# Altium PCB 8810.PcbDoc (part 1 of 2)
Units mm, origin at the board's own origin, x right, y up, seen from the top; angles counter-clockwise.
Board outline 295 x 220 mm, 2 copper layers (Top Layer, Bottom Layer); 156 components, 134 nets, 555 pads, 13 vias.
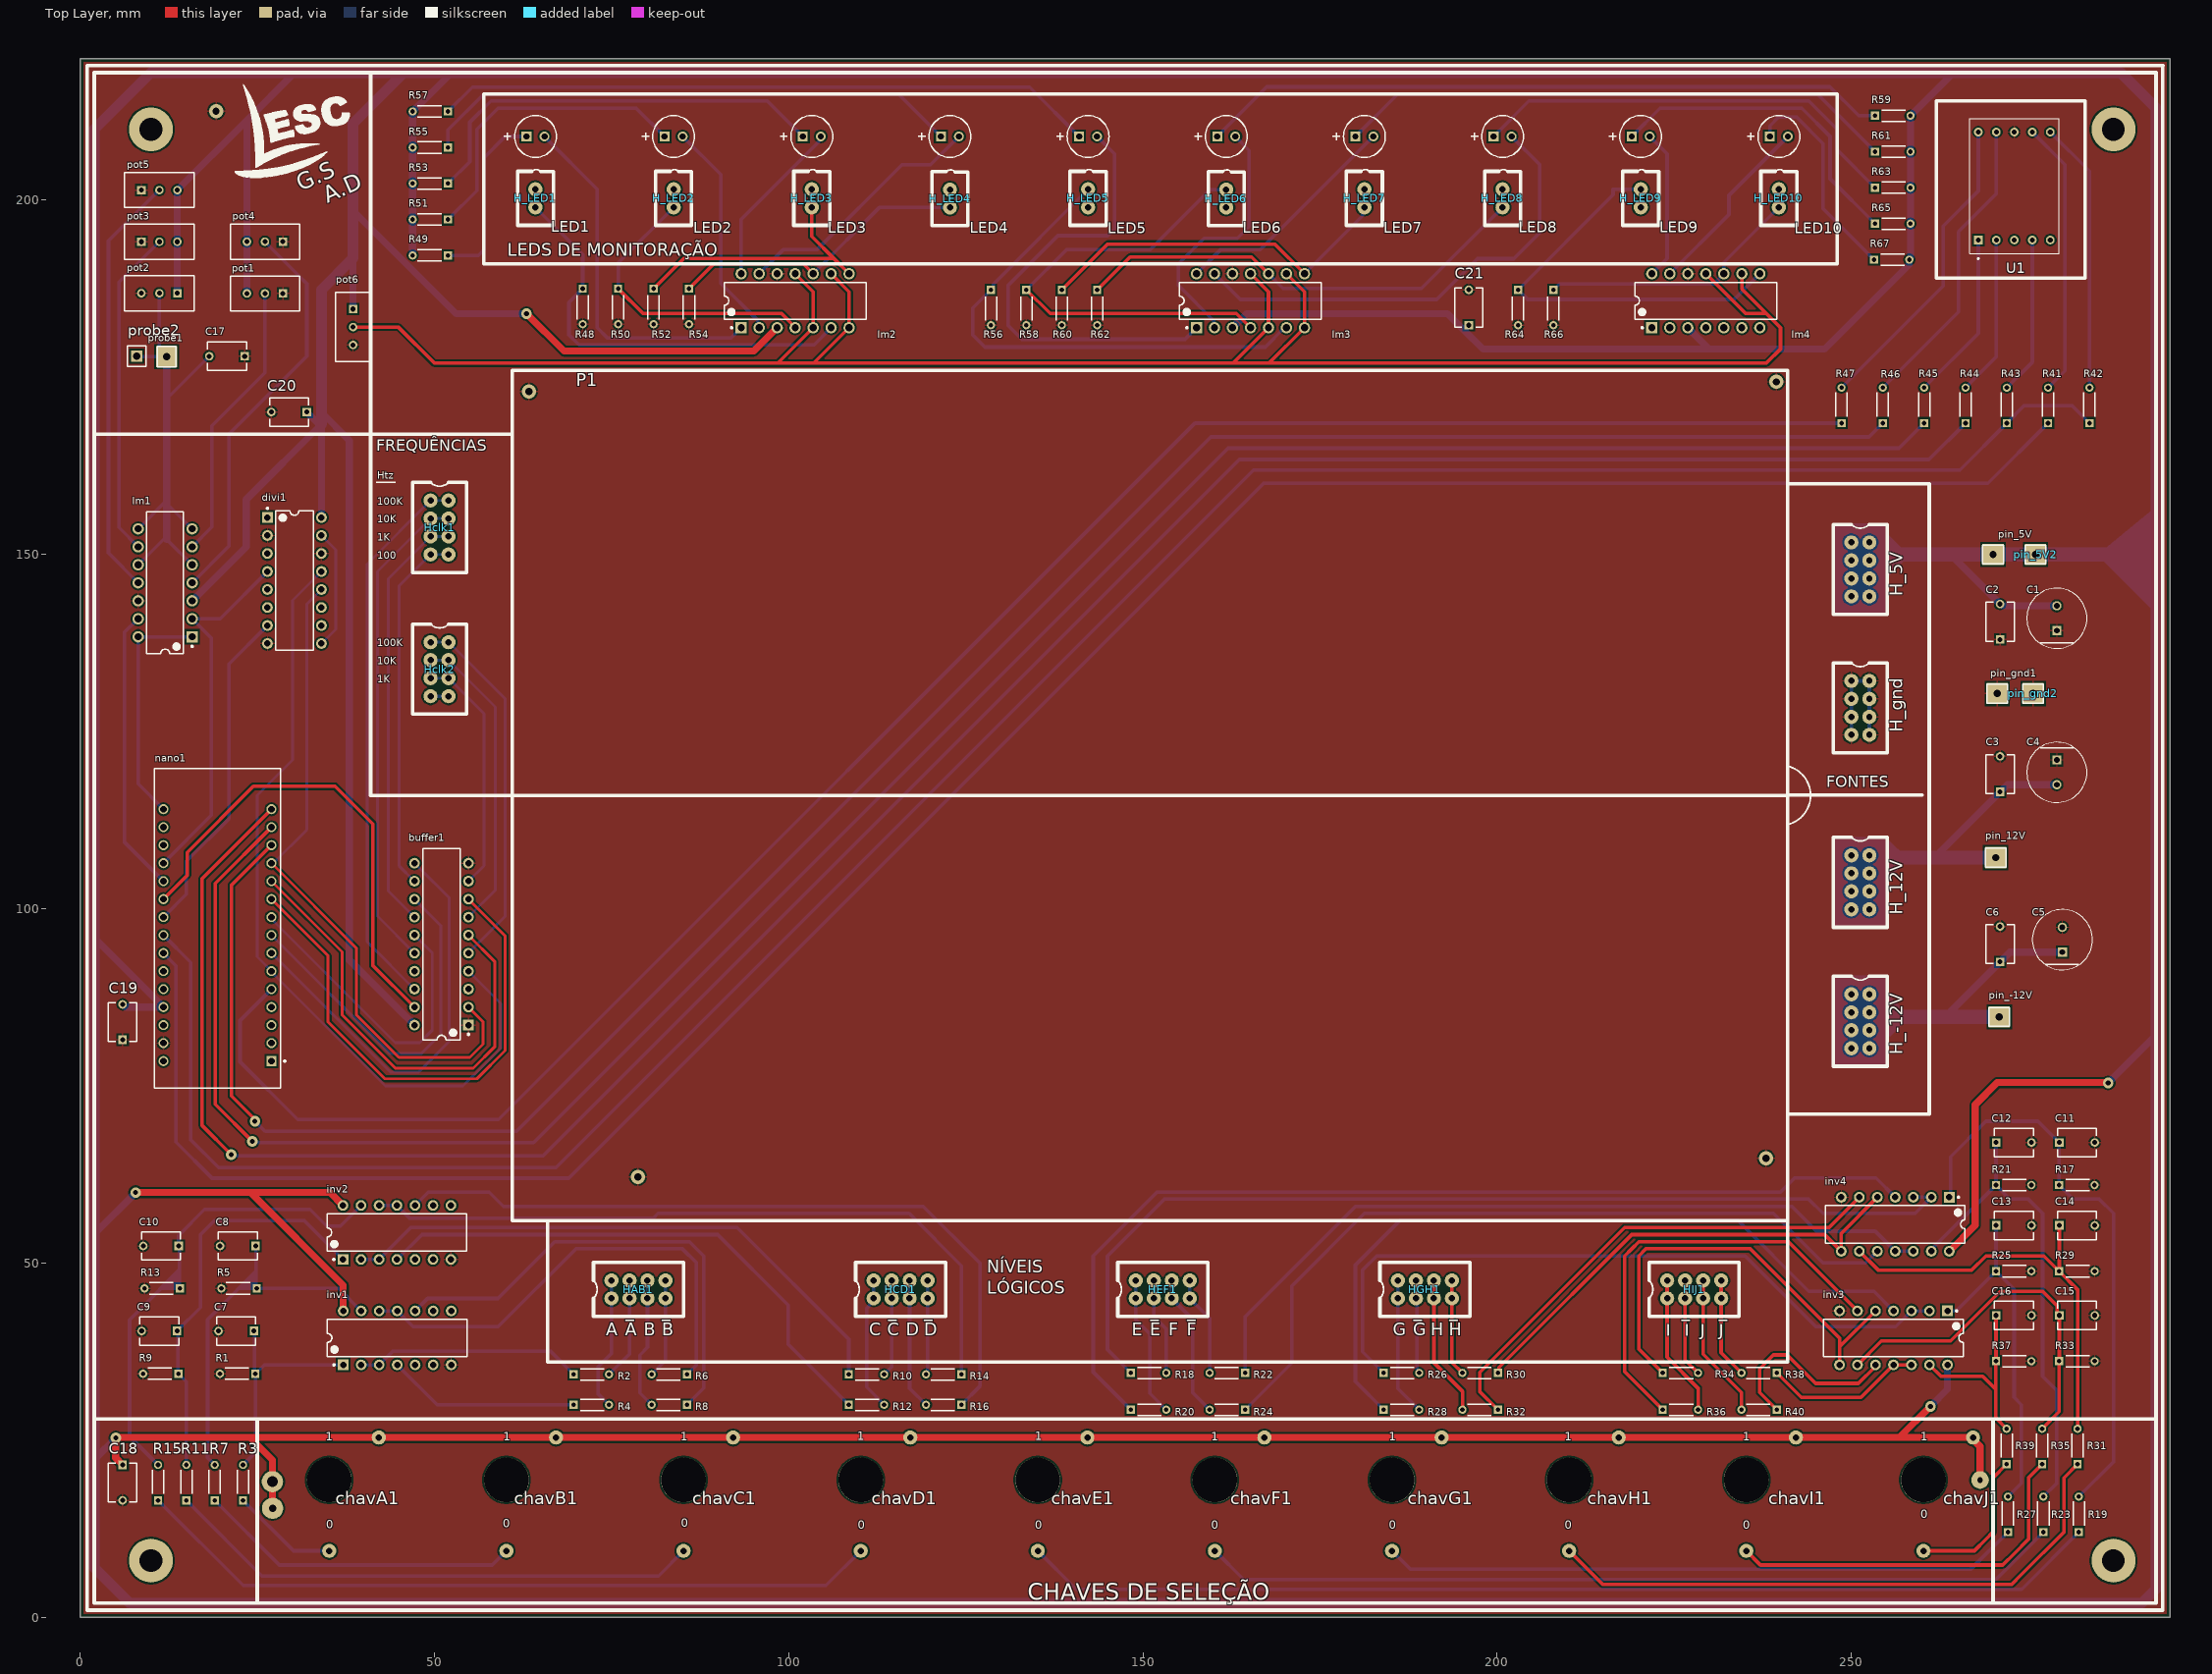
[diagram p0: Top Layer view]
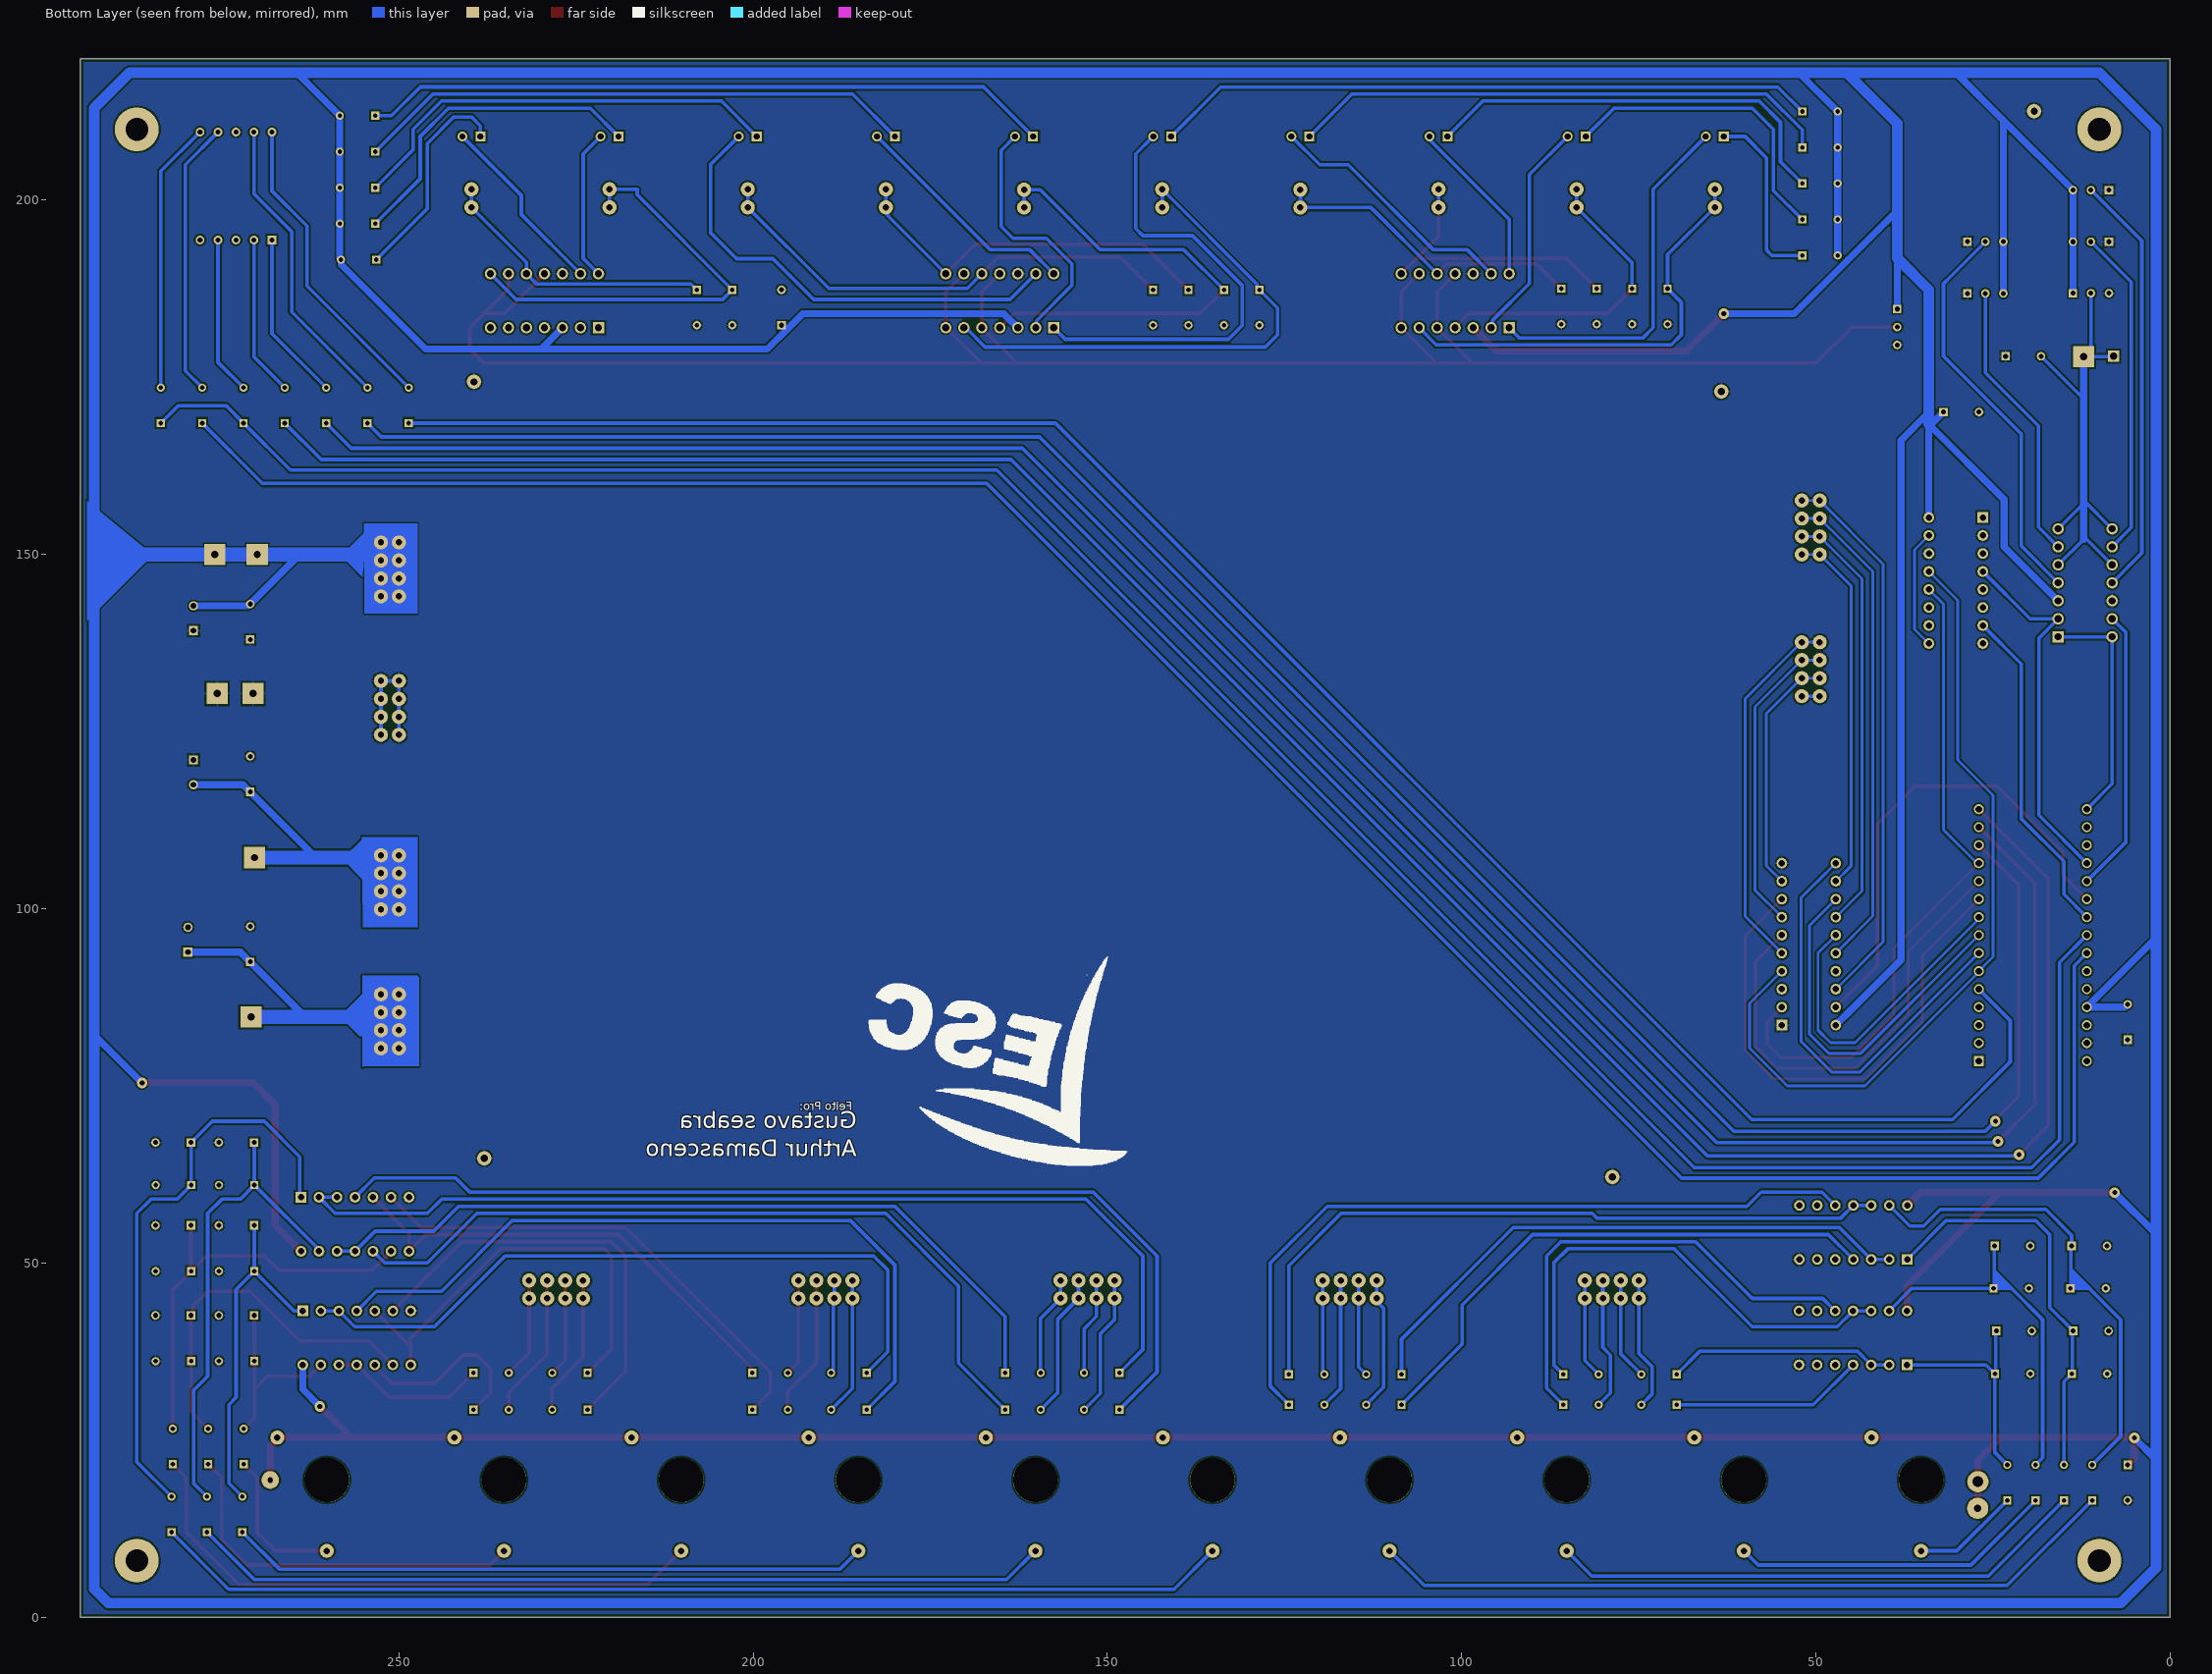
[diagram p1: Bottom Layer view, seen from below]

## Layer stack, top to bottom
Top Solder: solder mask 0.0102, Solder Resist, Dk 3.5
Top Layer: signal copper 0.0356
Dielectric 1: dielectric 0.32, FR-4, Dk 4.8
Bottom Layer: signal copper 0.0356
Bottom Solder: solder mask 0.0102, Solder Resist, Dk 3.5

## Board outline
0,0 295,0 295,220 0,220

## Design rules (kind name [scope] priority, off if disabled: settings)
BoardOutlineClearance [All] p1: gap=0.5 ignorepadtopadclearanceinfootprint=FALSE
Clearance [All] p1: gap=0.254 ignorepadtopadclearanceinfootprint=FALSE
PolygonConnect [All] p1: connectstyle=Relief reliefconductorwidth=0.254 reliefentries=4 polygonreliefangle="90 Angle" airgapwidth=0.254
RoutingVias [All] p1: holewidth=0.711 width=1.5 viastyle="Through Hole" minholewidth=0.15 minwidth=0.35 maxholewidth=6 maxwidth=8
SolderMaskExpansion [All] p1: expansion=0.102 istentingtop=FALSE
Width [All] p1: maxlimit=2 minlimit=0.2 preferedwidth=0.5
30 further rules are at their usual default settings.

## Classes and differential pairs
component class probe: C17 divi1 lm1 "PONTA DE PROVA" pot1 pot2 pot3 pot4 pot5 probe1 probe2 R41 R42 R43 R44 R45 R46 R47 U1
component class alimentacao: C1 C2 C3 C4 C5 C6 H_5V H_12V H_-12V H_-12v H_gnd pin_5V pin_5V2 pin_12V pin_-12V pin_gnd1 pin_gnd2
component class clock: buffer1 C19 C20 Hclk1 Hclk2 nano1
component class leds: C21 H_LED1 H_LED2 H_LED3 H_LED4 H_LED5 H_LED6 H_LED7 H_LED8 H_LED9 H_LED10 LED1 LED2 LED3 LED4 LED5 LED6 LED7 LED8 LED9 LED10 lm2 lm3 lm4 pot6 R48 R49 R50 R51 R52 R53 R54 R55 R56 R57 R58 R59 R60 R61 R62 R63 R64 R65 R66 R67
component class protoboard: P1
component class chaves: C7 C8 C9 C10 C11 C12 C13 C14 C15 C16 C18 chavA1 chavB1 chavC1 chavD1 chavE1 chavF1 chavG1 chavH1 chavI1 chavJ1 HAB1 HCD1 HEF1 HGH1 HIJ1 inv1 inv2 inv3 inv4 j R1 R2 R3 R4 R5 R6 R7 R8 R9 R10 R11 R12 R13 R14 R15 R16 R17 R18 R19 R20 R21 R22 R23 R24 R25 R26 R27 R28 R29 R30 R31 R32 R33 R34 R35 R36 R37 R38 R39 R40

## Components (designator, comment, footprint, x,y, rotation, side; value= is the part's Value field where it differs from the comment)
buffer1 "SN74LS241N" N0020A 51,95 r180 top locked
C1 "EEU-FM1H101BJ" FP-FM8-MFG 279,141 r90 top locked
C2 "RCER71H335K3K1H03B" FP-RCE3M1-MFG 271,140.5 r90 top locked
C3 "RCER71H335K3K1H03B" FP-RCE3M1-MFG 271,119 r90 top locked
C4 "EEU-FM1H101BJ" FP-FM8-MFG 279,119.25 r270 top locked
C5 "EEU-FM1H101BJ" FP-FM8-MFG 279.78,95.632 r90 top locked
C6 "RCER71H335K3K1H03B" FP-RCE3M1-MFG 271,95 r90 top locked
C7 "RCER71H335K3K1H03B" FP-RCE3M1-MFG 22.031,40.409 r180 top locked
C8 "RCER71H335K3K1H03B" FP-RCE3M1-MFG 22.263,52.4 r180 top locked
C9 "RCER71H335K3K1H03B" FP-RCE3M1-MFG 11.185,40.409 r180 top locked
C10 "RCER71H335K3K1H03B" FP-RCE3M1-MFG 11.417,52.4 r180 top locked
C11 "RCER71H335K3K1H03B" FP-RCE3M1-MFG 281.854,67 r0 top locked
C12 "RCER71H335K3K1H03B" FP-RCE3M1-MFG 272.934,67 r0 top locked
C13 "RCER71H335K3K1H03B" FP-RCE3M1-MFG 272.934,55.307 r0 top locked
C14 "RCER71H335K3K1H03B" FP-RCE3M1-MFG 281.854,55.307 r0 top locked
C15 "RCER71H335K3K1H03B" FP-RCE3M1-MFG 281.862,42.603 r0 top locked
C16 "RCER71H335K3K1H03B" FP-RCE3M1-MFG 272.934,42.603 r0 top locked
C17 "RCER71H335K3K1H03B" FP-RCE3M1-MFG 20.73,177.98 r180 top locked
C18 "RCER71H335K3K1H03B" FP-RCE3M1-MFG 6,19 r270 top locked
C19 "RCER71H335K3K1H03B" FP-RCE3M1-MFG 6,84 r90 top locked
C20 "RCER71H335K3K1H03B" FP-RCE3M1-MFG 29.493,170.096 r180 top locked
C21 "RCER71H335K3K1H03B" FP-RCE3M1-MFG 196,184.857 r90 top locked
chavA1 "chave MTS-102" MTS-102 35.168,19.372 r270 top locked
chavB1 "chave MTS-102" MTS-102 60.168,19.372 r270 top locked
chavC1 "chave MTS-102" MTS-102 85.168,19.372 r270 top locked
chavD1 "chave MTS-102" MTS-102 110.168,19.372 r270 top locked
chavE1 "chave MTS-102" MTS-102 135.168,19.372 r270 top locked
chavF1 "chave MTS-102" MTS-102 160.168,19.372 r270 top locked
chavG1 "chave MTS-102" MTS-102 185.168,19.372 r270 top locked
chavH1 "chave MTS-102" MTS-102 210.168,19.372 r270 top locked
chavI1 "chave MTS-102" MTS-102 235.168,19.372 r270 top locked
chavJ1 "chave MTS-102" MTS-102 260.168,19.372 r270 top locked
divi1 "CD74HC390E" N0016A 30.253,146.325 r0 top
H_5V "header 2x4" "header 2x4" 250,151.7 r0 top locked
H_12V "header 2x4" "header 2x4" 250,107.54 r0 top locked
H_-12V "header 2x4" "header 2x4" 250,87.92 r0 top locked
H_gnd "header 2x4" "header 2x4" 250,132.16 r0 top locked
H_LED1 "header 2x1" "header 2x1" 64.27,201.54 r0 top locked
H_LED2 "header 2x1" "header 2x1" 83.77,201.54 r0 top locked
H_LED3 "header 2x1" "header 2x1" 103.27,201.54 r0 top locked
H_LED4 "header 2x1" "header 2x1" 122.77,201.5 r0 top locked
H_LED5 "header 2x1" "header 2x1" 142.27,201.54 r0 top locked
H_LED6 "header 2x1" "header 2x1" 161.77,201.5 r0 top locked
H_LED7 "header 2x1" "header 2x1" 181.27,201.54 r0 top locked
H_LED8 "header 2x1" "header 2x1" 200.77,201.54 r0 top locked
H_LED9 "header 2x1" "header 2x1" 220.27,201.54 r0 top locked
H_LED10 "header 2x1" "header 2x1" 239.77,201.54 r0 top locked
HAB1 "header 2x4" "header 2x4" 75,45 r90 top locked
HCD1 "header 2x4" "header 2x4" 112,45 r90 top locked
Hclk1 "header 2x4" "header 2x4" 49.46,157.62 r0 top locked
Hclk2 "header 2x4" "header 2x4" 49.46,137.62 r0 top locked
HEF1 "header 2x4" "header 2x4" 149,45 r90 top locked
HGH1 "header 2x4" "header 2x4" 186,45 r90 top locked
HIJ1 "header 2x4" "header 2x4" 224,45 r90 top locked
inv1 "SN74HC14N" N0014A 44.752,39.43 r90 top
inv2 "SN74HC14N" N0014A 44.726,54.311 r90 top
inv3 "SN74HC14N" N0014A 255.944,39.43 r270 top
inv4 "SN74HC14N" N0014A 256.2,55.464 r270 top
LED1 "WP7113SGD" KING-WP7113SGD_V 64.27,209 r0 top locked
LED2 "WP7113SGD" KING-WP7113SGD_V 83.77,209 r0 top locked
LED3 "WP7113SGD" KING-WP7113SGD_V 103.27,209 r0 top locked
LED4 "WP7113SGD" KING-WP7113SGD_V 122.77,209 r0 top locked
LED5 "WP7113SGD" KING-WP7113SGD_V 142.27,209 r0 top locked
LED6 "WP7113SGD" KING-WP7113SGD_V 161.77,209 r0 top locked
LED7 "WP7113SGD" KING-WP7113SGD_V 181.27,209 r0 top locked
LED8 "WP7113SGD" KING-WP7113SGD_V 200.77,209 r0 top locked
LED9 "WP7113SGD" KING-WP7113SGD_V 220.27,209 r0 top locked
LED10 "WP7113SGD" KING-WP7113SGD_V 239.77,209 r0 top locked
lm1 "LM339J" J0014A 12,146 r180 top
lm2 "LM339J" J0014A 100.92,185.81 r90 top
lm3 "LM339J" J0014A 165.19,185.81 r90 top
lm4 "LM339J" J0014A 229.46,185.81 r90 top
nano1 "A000005" FP-A000005-MFG 19.385,97.223 r180 top locked
P1 "2 protoboard 830 pin" PCBComponent_1 241,56 r180 top locked
pin_5V "TSW-101-07-L-S" FP-TSW-101-07-L-S-MFG#1 270,150 r180 top locked
pin_5V2 "TSW-101-07-L-S" FP-TSW-101-07-L-S-MFG#1 276,150 r180 top locked
pin_12V "TSW-101-07-L-S" FP-TSW-101-07-L-S-MFG#1 270.365,107.213 r180 top locked
pin_-12V "TSW-101-07-L-S" FP-TSW-101-07-L-S-MFG#1 270.881,84.731 r180 top locked
pin_gnd1 "TSW-101-07-L-S" FP-TSW-101-07-L-S-MFG#1 270.587,130.368 r180 top locked
pin_gnd2 "TSW-101-07-L-S" FP-TSW-101-07-L-S-MFG#1 275.667,130.368 r180 top locked
pot1 "3296W-1-501LF" FP-3296W-MFG 26.085,186.839 r90 top locked
pot2 "3296W-1-501LF" FP-3296W-MFG 11.18,186.859 r90 top locked
pot3 "3296W-1-501LF" FP-3296W-MFG 11.18,194.143 r270 top locked
pot4 "3296W-1-501LF" FP-3296W-MFG 26.085,194.134 r90 top locked
pot5 "3296W-1-501LF" FP-3296W-MFG 11.18,201.438 r270 top locked
pot6 "3296W-1-501LF" FP-3296W-MFG 38.527,182.102 r180 top locked
probe1 "TSW-101-07-L-S" FP-TSW-101-07-L-S-MFG#1 12.228,177.926 r90 top locked
probe2 "TSW-101-07-L-S" FP-TSW-101-07-L-S-MFG#2 8,178 r90 top locked
R1 "MRS16000C2002FCT00" FP-MRS1600-MFG 22.234,34.362 r180 top locked
R2 "MRS16000C2002FCT00" FP-MRS1600-MFG 72.152,34.279 r0 top locked
R3 "MRS16000C2002FCT00" FP-MRS1600-MFG 23,19 r90 top locked
R4 "MRS16000C2002FCT00" FP-MRS1600-MFG 72.152,29.988 r0 top locked
R5 "MRS16000C2002FCT00" FP-MRS1600-MFG 22.431,46.414 r180 top locked
R6 "MRS16000C2002FCT00" FP-MRS1600-MFG 83.161,34.279 r180 top locked
R7 "MRS16000C2002FCT00" FP-MRS1600-MFG 19,19 r90 top locked
R8 "MRS16000C2002FCT00" FP-MRS1600-MFG 83.161,29.988 r180 top locked
R9 "MRS16000C2002FCT00" FP-MRS1600-MFG 11.388,34.362 r180 top locked
R10 "MRS16000C2002FCT00" FP-MRS1600-MFG 110.985,34.279 r0 top locked
R11 "MRS16000C2002FCT00" FP-MRS1600-MFG 15,19 r90 top locked
R12 "MRS16000C2002FCT00" FP-MRS1600-MFG 110.985,29.988 r0 top locked
R13 "MRS16000C2002FCT00" FP-MRS1600-MFG 11.586,46.414 r180 top locked
R14 "MRS16000C2002FCT00" FP-MRS1600-MFG 121.885,34.279 r180 top locked
R15 "MRS16000C2002FCT00" FP-MRS1600-MFG 11,19 r90 top locked
R16 "MRS16000C2002FCT00" FP-MRS1600-MFG 121.885,29.988 r180 top locked
R17 "MRS16000C2002FCT00" FP-MRS1600-MFG 281.829,61 r0 top locked
R18 "MRS16000C2002FCT00" FP-MRS1600-MFG 150.806,34.478 r0 top locked
R19 "MRS16000C2002FCT00" FP-MRS1600-MFG 282.104,14.518 r90 top locked
R20 "MRS16000C2002FCT00" FP-MRS1600-MFG 150.806,29.29 r0 top locked
R21 "MRS16000C2002FCT00" FP-MRS1600-MFG 272.909,61 r0 top locked
R22 "MRS16000C2002FCT00" FP-MRS1600-MFG 161.925,34.478 r180 top locked
R23 "MRS16000C2002FCT00" FP-MRS1600-MFG 277.1,14.518 r90 top locked
R24 "MRS16000C2002FCT00" FP-MRS1600-MFG 161.925,29.29 r180 top locked
R25 "MRS16000C2002FCT00" FP-MRS1600-MFG 272.909,48.841 r0 top locked
R26 "MRS16000C2002FCT00" FP-MRS1600-MFG 186.494,34.478 r0 top locked
R27 "MRS16000C2002FCT00" FP-MRS1600-MFG 272.095,14.518 r90 top locked
R28 "MRS16000C2002FCT00" FP-MRS1600-MFG 186.494,29.29 r0 top locked
R29 "MRS16000C2002FCT00" FP-MRS1600-MFG 281.837,48.841 r0 top locked
R30 "MRS16000C2002FCT00" FP-MRS1600-MFG 197.613,34.478 r180 top locked
R31 "MRS16000C2002FCT00" FP-MRS1600-MFG 281.928,24.1 r90 top locked
R32 "MRS16000C2002FCT00" FP-MRS1600-MFG 197.613,29.29 r180 top locked
R33 "MRS16000C2002FCT00" FP-MRS1600-MFG 281.837,36.138 r0 top locked
R34 "MRS16000C2002FCT00" FP-MRS1600-MFG 225.872,34.478 r0 top locked
R35 "MRS16000C2002FCT00" FP-MRS1600-MFG 276.924,24.1 r90 top locked
R36 "MRS16000C2002FCT00" FP-MRS1600-MFG 225.872,29.29 r0 top locked
R37 "MRS16000C2002FCT00" FP-MRS1600-MFG 272.909,36.138 r0 top locked
R38 "MRS16000C2002FCT00" FP-MRS1600-MFG 236.991,34.478 r180 top locked
R39 "MRS16000C2002FCT00" FP-MRS1600-MFG 271.919,24.1 r90 top locked
R40 "MRS16000C2002FCT00" FP-MRS1600-MFG 236.991,29.29 r180 top locked
R41 "MRS16000C2002FCT00" FP-MRS1600-MFG 277.774,171.038 r90 top locked
R42 "MRS16000C2002FCT00" FP-MRS1600-MFG 283.608,171.038 r90 top locked
R43 "MRS16000C2002FCT00" FP-MRS1600-MFG 271.941,171.038 r90 top locked
R44 "MRS16000C2002FCT00" FP-MRS1600-MFG 266.107,171.038 r90 top locked
R45 "MRS16000C2002FCT00" FP-MRS1600-MFG 260.274,171.038 r90 top locked
R46 "MRS16000C2002FCT00" FP-MRS1600-MFG 254.441,171.038 r90 top locked
R47 "MRS16000C2002FCT00" FP-MRS1600-MFG 248.607,171.038 r90 top locked
R48 "MRS16000C2002FCT00" FP-MRS1600-MFG 70.939,185.009 r270 top locked
R49 "MRS16000C2002FCT00" FP-MRS1600-MFG 49.438,192.206 r180 top locked
R50 "MRS16000C2002FCT00" FP-MRS1600-MFG 75.939,185.009 r270 top locked
R51 "MRS16000C2002FCT00" FP-MRS1600-MFG 49.438,197.284 r180 top locked
R52 "MRS16000C2002FCT00" FP-MRS1600-MFG 80.939,185.009 r270 top locked
R53 "MRS16000C2002FCT00" FP-MRS1600-MFG 49.438,202.362 r180 top locked
R54 "MRS16000C2002FCT00" FP-MRS1600-MFG 85.939,185.009 r270 top locked
R55 "MRS16000C2002FCT00" FP-MRS1600-MFG 49.438,207.44 r180 top locked
R56 "MRS16000C2002FCT00" FP-MRS1600-MFG 128.559,184.857 r270 top locked
R57 "MRS16000C2002FCT00" FP-MRS1600-MFG 49.438,212.518 r180 top locked
R58 "MRS16000C2002FCT00" FP-MRS1600-MFG 133.559,184.857 r270 top locked
R59 "MRS16000C2002FCT00" FP-MRS1600-MFG 255.847,211.927 r0 top locked
R60 "MRS16000C2002FCT00" FP-MRS1600-MFG 138.559,184.857 r270 top locked
R61 "MRS16000C2002FCT00" FP-MRS1600-MFG 255.847,206.849 r0 top locked
R62 "MRS16000C2002FCT00" FP-MRS1600-MFG 143.559,184.857 r270 top locked
R63 "MRS16000C2002FCT00" FP-MRS1600-MFG 255.847,201.771 r0 top locked
R64 "MRS16000C2002FCT00" FP-MRS1600-MFG 202.949,184.857 r270 top locked
R65 "MRS16000C2002FCT00" FP-MRS1600-MFG 255.847,196.693 r0 top locked
R66 "MRS16000C2002FCT00" FP-MRS1600-MFG 207.949,184.857 r270 top locked
R67 "MRS16000C2002FCT00" FP-MRS1600-MFG 255.686,191.615 r0 top locked
U1 "LDSC512RI" LED_LDSC512RI 273,202 r90 top locked

## Footprints (in the part's own frame and the unit in brackets; to place one, negate y for a bottom-side part, rotate by r counter-clockwise, add the part's x,y. Pads: shape width x height; smd on the part's side, far side on the other; paste and mask are expansions set on the pad)
FP-3296W-MFG [mm]
  rect 1.2x1.2 hole 0.7 paste-2539.97 mask+0: 1(0.005,-2.54)
  round 1.2 hole 0.7 paste-2539.97 mask+0: 2(0.005,0) 3(0.005,2.54)
  silkscreen extent -2.48,-4.89 2.48,4.89, body extent -2.58,-4.99 2.58,4.99, height 0.25
FP-A000005-MFG [mil]
  rect 55.67x55.67 hole 35.98 paste-99999 mask+0: 1(-300,737.5)
  round 55.67 hole 35.98 paste-99999 mask+0: 2(-300,637.5) 3(-300,537.5) 4(-300,437.5) 5(-300,337.5) 6(-300,237.5) 7(-300,137.5) 8(-300,37.5) 9(-300,-62.5) 10(-300,-162.5) 11(-300,-262.5) 12(-300,-362.5) 13(-300,-462.5) 14(-300,-562.5) 15(-300,-662.5) 16(300,-662.5) 17(300,-562.5) 18(300,-462.5) 19(300,-362.5) 20(300,-262.5) 21(300,-162.5) 22(300,-62.5) 23(300,37.5) 24(300,137.5) 25(300,237.5) 26(300,337.5) 27(300,437.5) 28(300,537.5) 29(300,637.5) 30(300,737.5)
  silkscreen extent -379,-888 350,887, body extent -354,-891 354,891, height 10
FP-FM8-MFG [mm]
  rect 1.3x1.3 hole 0.8 paste-2539.97 mask+0: 1(-1.75,0)
  round 1.3 hole 0.8 paste-2539.97 mask+0: 2(1.75,0)
  silkscreen extent -4.25,-4.25 4.25,4.25, body extent -4.35,-4.35 4.35,4.35, height 0.25
FP-MRS1600-MFG [mm]
  rect 1.15x1.15 hole 0.65 paste-2539.97 mask+0: 1(-2.5,0)
  round 1.15 hole 0.65 paste-2539.97 mask+0: 2(2.5,0)
  silkscreen extent -1.55,-0.8 1.8,0.8, body extent -3.17,-0.9 3.17,0.9, height 0.25
FP-RCE3M1-MFG [mm]
  rect 1.2x1.2 hole 0.7 paste-2539.97 mask+0: 1(-2.5,0)
  round 1.2 hole 0.7 paste-2539.97 mask+0: 2(2.5,0)
  silkscreen extent -2.75,-2 2.75,2, body extent -3.2,-2.1 3.2,2.1, height 0.25
FP-TSW-101-07-L-S-MFG#1 [mm]
  rect 3x3 hole 1.02 paste-2539.97 mask+0: 1(0,0)
  silkscreen extent -1.46,-1.34 1.46,1.34, body extent -1.56,-1.44 1.56,1.44, height 0.25
FP-TSW-101-07-L-S-MFG#2 [mm]
  rect 1.57x1.57 hole 1.02 paste-2539.97 mask+0: 1(0,0)
  silkscreen extent -1.46,-1.34 1.46,1.34, body extent -1.56,-1.44 1.56,1.44, height 0.25
"header 2x1" [mm] "header male 2x1"
  round 2 hole 0.9: C1(0,0) C2(0,-2.54)
  silkscreen extent -2.54,-5.08 2.54,2.78, body extent -1.25,-3.75 1.25,1.33, height 8.4
"header 2x4" [mm] "header female 2x4"
  round 2 hole 0.9: C1(0,0) C2(2.54,0) C3(0,-2.54) C4(2.54,-2.54) C5(0,-5.08) C6(2.54,-5.08) C7(0,-7.62) C8(2.54,-7.62)
  silkscreen extent -2.54,-10.16 5.08,2.54, body extent -1.27,-8.89 3.81,1.27, height 4.5
J0014A [mm] "DIP, 14-Leads, Body 19.95x7.2mm, Pitch 2.54mm"
  rect 1.6x1.6 hole 1: 1(-3.81,7.62)
  round 1.6 hole 1: 2(-3.81,5.08) 3(-3.81,2.54) 4(-3.81,0) 5(-3.81,-2.54) 6(-3.81,-5.08) 7(-3.81,-7.62) 8(3.81,-7.62) 9(3.81,-5.08) 10(3.81,-2.54) 11(3.81,0) 12(3.81,2.54) 13(3.81,5.08) 14(3.81,7.62)
  silkscreen extent -3.94,-10 2.6,10, body extent -3.96,-9.97 3.96,9.97, height 5.08
KING-WP7113SGD_V [mm] "THD, 2-Leads, Dia 5.9mm, Body Length 8.6mm"
  rect 1.4x1.4 hole 0.889: 1(-1.27,0)
  round 1.4 hole 0.889: 2(1.27,0)
  silkscreen extent -4.47,-2.95 2.95,2.95, body extent -2.95,-2.95 2.5,2.95, height 15.5
LED_LDSC512RI [mm]
  rect 1.218x1.218 / inner round 1.218 / far side rect 1.218x1.218 hole 0.71: 1(-7.62,5.08)
  round 1.218 hole 0.71: 2(-7.62,2.54) 3(-7.62,0) 4(-7.62,-2.54) 5(-7.62,-5.08) 6(7.62,-5.08) 7(7.62,-2.54) 8(7.62,0) 9(7.62,2.54) 10(7.62,5.08)
  silkscreen extent -10.35,-6.3 9.5,6.3, body extent -9.37,-6.17 9.63,6.43, height 8
MTS-102 [mm] "chave MTS-102,"
  round 6.3 hole 6.3 unplated: C1(0,0)
  round 2 hole 0.9: C2(10,0) C3(-6,7)
  body extent -6.6,-3.95 6.6,3.95, height 18.34
N0014A [mm] "DIP, 14-Leads, Body 19.7x6.6mm, Pitch 2.54mm"
  rect 1.5x1.5 hole 0.9: 1(-3.81,7.62)
  round 1.5 hole 0.9: 2(-3.81,5.08) 3(-3.81,2.54) 4(-3.81,0) 5(-3.81,-2.54) 6(-3.81,-5.08) 7(-3.81,-7.62) 8(3.81,-7.62) 9(3.81,-5.08) 10(3.81,-2.54) 11(3.81,0) 12(3.81,2.54) 13(3.81,5.08) 14(3.81,7.62)
  silkscreen extent -3.93,-9.85 2.65,9.85, body extent -3.95,-9.85 3.95,9.85, height 5.08
N0016A [mm] "DIP, 16-Leads, Body 19.7x6.6mm, Pitch 2.54mm"
  rect 1.5x1.5 hole 0.9: 1(-3.81,8.89)
  round 1.5 hole 0.9: 2(-3.81,6.35) 3(-3.81,3.81) 4(-3.81,1.27) 5(-3.81,-1.27) 6(-3.81,-3.81) 7(-3.81,-6.35) 8(-3.81,-8.89) 9(3.81,-8.89) 10(3.81,-6.35) 11(3.81,-3.81) 12(3.81,-1.27) 13(3.81,1.27) 14(3.81,3.81) 15(3.81,6.35) 16(3.81,8.89)
  silkscreen extent -3.93,-9.85 2.65,10.31, body extent -3.95,-9.85 3.95,9.85, height 5.08
N0020A [mm] "DIP, 20-Leads, Body 26.9x6.6mm, Pitch 2.54mm"
  rect 1.5x1.5 hole 0.9: 1(-3.81,11.43)
  round 1.5 hole 0.9: 2(-3.81,8.89) 3(-3.81,6.35) 4(-3.81,3.81) 5(-3.81,1.27) 6(-3.81,-1.27) 7(-3.81,-3.81) 8(-3.81,-6.35) 9(-3.81,-8.89) 10(-3.81,-11.43) 11(3.81,-11.43) 12(3.81,-8.89) 13(3.81,-6.35) 14(3.81,-3.81) 15(3.81,-1.27) 16(3.81,1.27) 17(3.81,3.81) 18(3.81,6.35) 19(3.81,8.89) 20(3.81,11.43)
  silkscreen extent -3.94,-13.5 2.65,13.5, body extent -3.95,-13.45 3.95,13.45, height 5.08
PCBComponent_1 [mm] "2 protoboad 830 pin each"
  silkscreen extent -3.24,-120 180,0, body extent 7,-114.75 172,-4.5, height 10

## Part data
buffer1: library part CMP-0440-00144-3, "Octal Buffers And Line Drivers With 3-State Outputs, N0020A, TUBE", F @ Nom Voltage(Max)(Mhz)=35, Generic Part Number=SN74LS241, ICC @ Nom Voltage(Max)(mA)=0.046, Manufacturer="Texas Instruments", Operating Temperature Range(C)="0 to 70", Rating=Catalog, tpd @ Nom Voltage(Max)(ns)=18, Voltage(Nom)(V)=5, Bits(#)=8, Code_JEDEC=MS-001, DatasheetVersion=SDLS144C, Input Type=TTL, Output Type=TTL, PackageReference=N0020A, PackageVersion=http://www.ti.com/lit/ml/mpdi002c/mpdi002c.pdf, VCC(Max)(V)=5.25, VCC(Min)(V)=4.75
C1 C4 C5: library part CMP-05427-000021-1, "CAP ALUM 100UF 20% 50V RADIAL", Capacitance=100uF, Case/Package=Radial, ESR (Equivalent Series Resistance)=61mR, Max Operating Temperature=105°C, Min Operating Temperature=-40°C, Package Quantity=1000, Ripple Current=870mA, Tolerance=20%, Voltage Rating=50V, Diameter=8mm, Dissipation Factor=0.1%, Features="General Purpose", Height=11.5mm, Height - Seated (Max)=0.512inch, Impedance=61mR, Lead Free="Lead Free", Lead Pitch=0.197inch, Length=11.5mm, Life (Hours)=3000Hour, Mount="Through Hole", Packaging="Ammo Pack", Polarity=Polar, Radiation Hardening=No, Series=FM, Termination=Radial, Voltage Rating (DC)=50V
C2 C3 C6 C7 C8 C9 C10 C11 C12 C13 C14 C15 C16 C17 C18 C19 C20 C21: library part CMP-06035-028451-1, "Cap Ceramic 3.3uF 50V X7R ±10% Radial 5mm +125°C Automotive Ammo Pack", Capacitance=3.3uF, Case/Package=Radial, Dielectric=X7R, Max Operating Temperature=125°C, Min Operating Temperature=-55°C, Package Quantity=500, Ratings=AEC-Q200, Resistor Type=Ceramic, Tolerance=10%, Voltage Rating=50V, Height=5mm, Height - Seated (Max)=0.197inch, Lead Diameter=0.5mm, Lead Pitch=0.197inch, Lead/Base Style="Formed Leads", Length=0.217inch, Mount="Through Hole", Packaging=Bulk, Termination=Radial, Voltage Rating (DC)=50V, Width=0.157inch
chavA1 chavB1 chavC1 chavD1 chavE1 chavF1 chavG1 chavH1 chavI1 chavJ1: library part MTS-102, "chave caso seja usadsada sendo encaixada", Parameter 1=MTS-102
divi1: library part CMP-1623-00557-2, "High Speed CMOS Logic Dual Decade Ripple Counters, N0016A, TUBE", F @ Nom Voltage(Max)(Mhz)=28, Generic Part Number=CD74HC390, ICC @ Nom Voltage(Max)(mA)=0.08, Manufacturer="Texas Instruments", Operating Temperature Range(C)="-55 to 125", Rating=Catalog, tpd @ Nom Voltage(Max)(ns)=52, Voltage(Nom)(V)=3.3,5, Bits(#)=4, Code_JEDEC=MS-001, DatasheetVersion=SCHS185C, Function=Counter, Input Type=LVTTL/CMOS, Inputs=1, Output Drive (IOL/IOH)(Max)(mA)=5.2/-5.2, Output Type=CMOS, PackageReference=N0016A, Schmitt Trigger=No, Technology Family=HC, Type=Decade, VCC(Max)(V)=6, VCC(Min)(V)=2
H_5V H_12V H_-12V H_gnd HAB1 HCD1 Hclk1 Hclk2 HEF1 HGH1 HIJ1: "header male 2x4", Parameter 1="header 2x4"
H_LED1 H_LED2 H_LED3 H_LED4 H_LED5 H_LED6 H_LED7 H_LED8 H_LED9 H_LED10: library part "Heade 1x2", "header male 2 pin", Parameter 1=H2x1
inv1 inv2 inv3 inv4: library part CMP-1615-00889-3, "Hex Schmitt-Trigger Inverters, N0014A, TUBE", F @ Nom Voltage(Max)(Mhz)=20, Generic Part Number=SN74HC14, ICC @ Nom Voltage(Max)(mA)=0.02, Manufacturer="Texas Instruments", Operating Temperature Range(C)="-40 to 85", Rating=Catalog, tpd @ Nom Voltage(Max)(ns)=31, Voltage(Nom)(V)=5, Bits(#)=6, Code_JEDEC=MS-001, DatasheetVersion=SCLS085G, Input Type=CMOS, Output Drive (IOL/IOH)(Max)(mA)=-4/4, Output Type=CMOS, PackageReference=N0014A, Schmitt Trigger=Yes, Technology Family=HC, VCC(Max)(V)=6, VCC(Min)(V)=2
LED1 LED2 LED3 LED4 LED5 LED6 LED7 LED8 LED9 LED10: library part CMP-2100-03698-1, "LED Green, 62.5 mW, 25 mA, -40 to 85 degC, 2-Pin THD, RoHS, Bulk", Case/Package=Radial, Colour=Green, Forward Voltage=2.2V, Manufacturer=Kingbright, Package Description="2-Pin Through Hole Device, Dia 5.9 mm, Body Length 8.6 mm", Package Quantity=1000, Test Current=20mA, Datasheet URL=http://www.kingbrightusa.com/images/catalog/SPEC/WP7113SGD.pdf, Datasheet Version="Rev. 6B, 01/2015", Dominant Wavelength=568nm, Height=8.6mm, Illumination Colour=Green, Lead Free=LeadFree, Lens Style=Tinted, Luminous Intensity=40mcd, Package Reference=WP7113SGD, Packaging=Bulk, RoHSCompliant=true, Viewing Angle=30degrees, Wavelength=568nm
lm1 lm2 lm3 lm4: library part CMP-0060-00012-3, "Low Power Low Offset Voltage Quad Comparator, 14-pin CerDIP", Manufacturer="Texas Instruments", PackageTopMarking=NSUZXYYTT*LM339J, PowerWise=N, ComponentLink1Description="Datasheet URL", ComponentLink1URL=http://www.ti.com/general/docs/lit/getliterature.tsp?genericPartNumber=LM339-N&fileType=pdf, CompType=Comparator, PackageDescription="Cerdip, .400 x .310in Body, 14 Lead, .300in Centers, .100in Pitch", PackageReference=J0014A, PinCount=14, RoHS=N
nano1: library part CMP-189986-000002-1, "ARDUINO NANO ATMEGA328 EVAL BRD", Operating Supply Voltage=12V, Package Quantity=50, Core Architecture=AVR, Data Bus Width=8b, Evaluation Kit=Yes, Height=0.25inch, Interface=I2C, Length=7inch, Number of Bits=8, Packaging=Bulk, REACH SVHC="No SVHC", Series="AVR® ATmega", Weight=0.358383oz, Width=5inch
P1: library part protoboard, "2 protoboard 830 pin  each", Parameter 1="2X830 pin"
pin_5V pin_5V2 pin_12V pin_-12V pin_gnd1 pin_gnd2 probe1 probe2: library part CMP-02766-001775-1, "CONN HEADER VERT 1POS", Color=Black, Flammability Rating="UL94 V-0", Max Current Rating=7.6A, Max Operating Temperature=125°C, Max Voltage Rating (AC)=550V, Min Operating Temperature=-55°C, Connector Type=Header, Contact Finish - Mating=GOLD, Contact Material=Bronze, Contact Mating Length=0.23inch, Contact Plating=Gold, Contact Shape=Square, Contact Type="Male Pin", Depth=2.54mm, Fastening Type=Pull, Gender=Male, Housing Color=Black, Housing Material=Polyester, Insulation Color=Black, Insulation Material=PBT, Lead Free="Lead Free", Length=2.54mm, Mount="Through Hole", Number of Contacts=1, Number of Positions=1, Number of Rows=1, Orientation=Straight, Packaging=Bulk, Radiation Hardening=No, Reach SVHC Compliant=Yes, RoHS Compliant=Yes, Series=TSW, Termination=Solder, Width=2.54mm
pot1 pot2 pot3 pot4 pot5 pot6: library part CMP-07234-000046-1, "TRIMMER 500 OHM 0.5W PC PIN TOP", Color=Blue, Max Operating Temperature=125°C, Max Power Dissipation=500mW, Min Operating Temperature=-55°C, Package Quantity=50, Resistance=500R, Resistance Tolerance=10%, Resistor Type=Cermet, Temperature Coefficient=100ppm/°C, Contact Plating=Tin, Depth=4.83mm, Height=0.395inch, Lead Free="Lead Free", Length=9.53mm, Military Standard=Not, Mount="Through Hole", Number of Turns=25, Packaging=Rail/Tube, Power Rating=500mW, Radiation Hardening=No, REACH SVHC="No SVHC", RoHS Compliant=Yes, Series=3296, Taper=Linear, Technology=CERMET, Termination=Pin, Tolerance=10%, Weight=0.03oz, Width=9.53mm
R1 R2 R3 R4 R5 R6 R7 R8 R9 R10 R11 R12 R13 R14 R15 R16 R17 R18 R19 R20 R21 R22 R23 R24 R25 R26 R27 R28 R29 R30 R31 R32 R33 R34 R35 R36 R37 R38 R39 R40 R41 R42 R43 R44 R45 R46 R47 R48 R49 R50 R51 R52 R53 R54 R55 R56 R57 R58 R59 R60 R61 R62 R63 R64 R65 R66 R67: library part CMP-02408-000019-1, "RES 20K OHM 0.4W 1% AXIAL", Case/Package=Conformal, Max Operating Temperature=155°C, Max Power Dissipation=400mW, Min Operating Temperature=-55°C, Resistance=20kR, Resistor Type="Metal Film", Temperature Coefficient=50ppm/°C, Tolerance=1%, Construction=Cylindrical, Contact Plating=Tin, Diameter=1.6mm, Length=3.6mm, Military Standard=Not, Mount="Through Hole", Number of Terminations=2, Packaging="Tape and Reel", Power Rating=400mW, Radiation Hardening=No, RoHS Compliant=Yes, Series=MRS16, Technology="THIN FILM", Termination=Axial
U1: ".56IN. 7 SEGMENT SINGLE DISPLAY, 565NM GREEN, GRAY FACE, WHITE SEGMENTS, COMMON", Package=None, Check_prices=https://www.snapeda.com/parts/LDS-C512RI/Lumex/view-part/?ref=eda, MF=Lumex, MP=LDS-C512RI, SnapEDA_Link=https://www.snapeda.com/parts/LDS-C512RI/Lumex/view-part/?ref=snap

## Free pads (board coordinates)
  round 6.2 hole 3.2 unplated: C11(10,210) C12(287,210) C13(287,8) C14(10,8)
  round 3 hole 1.5: C14(27.138,19.134)
  round 3 hole 1: C15(27.168,15.372)
  round 2.5 hole 0.8: C16(268.168,19.372)

## Via types
v1: diameter 1.5, hole 0.711, Top Layer to Bottom Layer, 8 vias
v2: diameter 2, hole 1, Top Layer to Bottom Layer, 5 vias

## Nets (pads, with @x,y where several pads share a name; then routed paths per layer and width w, separated by ;. In a path a pad name is that pad's centre, name@x,y a point inside that pad or via, vN(x,y) a via of type N, cw(c..) or ccw(c..) an arc to the next point about the centre after c; other vN are vias at no path point)
0.1HtzA: buffer1.11 nano1.7 | length 61.1
  Bottom Layer w0.4: nano1.7@27.005,93.73 43.805,76.931 47.757,76.931 52.095,81.268 52.095,101.561 49.865,103.791 49.829,103.791 buffer1.11@47.19,106.43
0.1HtzB: buffer1.9 Hclk2.C5 Hclk2.C6 | length 34.2
  Bottom Layer w0.4: Hclk2.C5@49.46,132.54 Hclk2.C6@52,132.54 57,127.54 57,106.08 buffer1.9@54.81,103.89
1HtzA: buffer1.13 nano1.8 | length 52.5
  Bottom Layer w0.4: nano1.8@27.005,96.27 43.683,79.592 48.204,79.592 50.923,82.312 50.923,97.617 buffer1.13@47.19,101.35
1HtzB: buffer1.7 Hclk2.C3 Hclk2.C4 | length 43.1
  Bottom Layer w0.4: Hclk2.C3@49.46,135.08 Hclk2.C4@52,135.08 58.608,128.472 58.608,102.608 buffer1.7@54.81,98.81
1KHtzA: buffer1.6 nano1.11 | length 66.2
  Top Layer w0.4: nano1.11@27.005,103.89 37,93.895 37,85 44.511,77.489 55.489,77.489 58.51,80.51 58.51,92.57 buffer1.6@54.81,96.27
1KHtzB: buffer1.14 Hclk1.C5 Hclk1.C6 | length 60.3
  Bottom Layer w0.4: buffer1.14@47.19,98.81 43.48,102.52 43.48,146.56 Hclk1.C5@49.46,152.54 Hclk1.C6@52,152.54
5V: buffer1.20 C1.2 C2.2 C18.1 C19.2 C20.1 C21.1 chavA1.C3 chavB1.C3 chavC1.C3 chavD1.C3 chavE1.C3 chavF1.C3 chavG1.C3 chavH1.C3 chavI1.C3 chavJ1.C3 divi1.16 H_5V.C1 H_5V.C2 H_5V.C3 H_5V.C4 H_5V.C5 H_5V.C6 H_5V.C7 H_5V.C8 inv1.14 inv2.14 inv3.14 inv4.14 lm1.3 lm2.3 lm3.3 lm4.3 nano1.27 pad.C14@27.138,19.134 pad.C15 pad.C16 pin_5V2.1 pin_5V.1 pot1.3 pot2.1 pot3.3 pot4.3 pot5.3 pot6.1 R49.2 R51.2 R53.2 R55.2 R57.2 R59.2 R61.2 R63.2 R65.2 R67.2 | length 1997.4
  Top Layer w1: C18.1@6,21.5 5,22.5 5,25.256 v1(5.044,25.301) 5.116,25.372 23.96,25.372 ; v1(7.839,59.936) 7.85,59.947 24.059,59.947 ; pad.C15@27.168,15.372 27.153,15.387 27.153,19.119 pad.C14@27.138,19.134 27.138,22.193 23.96,25.372 ; inv2.14@37.106,58.121 35.279,59.947 24.059,59.947 ; inv1.14@37.132,43.24 37.132,46.874 24.059,59.947 ; v1(63,184) 68.29,178.71 95.09,178.71 lm2.3@98.38,182 ; v1(261.165,29.762) 256.774,25.372 ; inv4.14@263.82,51.654 267.48,55.314 267.48,72.341 270.602,75.462 286.206,75.462 v1(286.254,75.414) ; pad.C16@268.168,19.372 268.168,24.101 267.168,25.101 chavJ1.C3@267.168,25.372 256.774,25.372 ; 23.96,25.372 chavA1.C3@42.168,25.372 chavB1.C3@67.168,25.372 chavC1.C3@92.168,25.372 chavD1.C3@117.168,25.372 chavE1.C3@142.168,25.372 chavF1.C3@167.168,25.372 chavG1.C3@192.168,25.372 chavH1.C3@217.168,25.372 chavI1.C3@242.168,25.372 256.774,25.372
  Bottom Layer w0.5: 248.6,145.754 250,144.354 H_5V.C7@250,144.08 H_5V.C8@252.54,144.08 H_5V.C6@252.54,146.62 H_5V.C5@250,146.62 H_5V.C3@250,149.16 H_5V.C4@252.54,149.16 ; H_5V.C1@250,151.7 H_5V.C2@252.54,151.7 H_5V.C4@252.54,150
  Bottom Layer w1: 2,53.5 2,54.098 v1(7.839,59.936) ; 2,95.875 nano1.27@11.765,86.11 6.444,86.11 6.054,86.5 C19.2@6,86.5 ; 2.176,22.433 v1(5.044,25.301) ; pot2.1@13.72,186.864 pot3.3@13.72,194.138 pot5.3@13.72,201.433 23.545,211.257 ; lm1.3@15.81,143.46 23.438,151.088 23.438,157.758 34.063,168.383 ; pot1.3@23.545,186.844 23.545,194.138 23.545,211.257 ; 30.178,218 30.178,217.891 23.545,211.257 ; C20.1@31.993,170.096 33.707,168.383 34.063,168.383 ; divi1.16@34.063,155.215 34.063,168.383 ; 34.063,170.053 38,166.116 38,92.76 44.783,85.977 buffer1.20@47.19,83.57 ; pot6.1@38.522,184.642 38.522,191.811 ; 38.522,198.543 53.064,184 v1(63,184) ; R49.2@46.938,192.206 R51.2@46.938,197.284 R53.2@46.938,202.362 R55.2@46.938,207.44 R57.2@46.938,212.518 52.42,218 52.893,218 ; lm3.3@162.65,182 164.65,184 193,184 195.152,181.848 ; C21.1@196,182.357 195.491,181.848 195.152,181.848 ; lm4.3@226.92,182 229.92,179 ; v1(261.165,29.762) 263.564,32.162 inv3.14@263.564,35.62 ; 263.927,150 264,150 C2.2@271,143 271.054,143 271.304,142.75 C1.2@279,142.75 ; 264.42,218 R59.2@258.347,211.927 R61.2@258.347,206.849 R63.2@258.347,201.771 R65.2@258.347,196.693 258.347,191.816 258.186,191.656 R67.2@258.186,191.615 258.157,191.586 258.157,190.916 246.241,179 242.787,179 229.92,179 ; v1(286.254,75.414) 293,82.161 293,83.956 ; 195.152,181.848 198,179 229.92,179
  Bottom Layer w1.5: 34.063,168.383 34.063,170.053 34.063,187.353 38.522,191.811 38.522,198.543 38.522,210.845 45.677,218 ; 292.949,155.855 293,155.907 293,213 288,218 264.42,218 52.893,218 45.677,218 ; 293,144 293,83.956 293,82.161 293,4 291,2 7,2 2,7 2,53.5 2,95.875 2,210 10,218 30.178,218 45.677,218
  Bottom Layer w2: H_5V.C4@252.54,149.16 253.38,150 263.927,150 pin_5V.1@270,150 pin_5V2.1@276,150 285.692,150
10HtzA: buffer1.15 nano1.9 | length 45.4
  Bottom Layer w0.3: nano1.9@27.005,98.571 nano1.9@27.005,98.81
  Bottom Layer w0.4: nano1.9@27.005,98.571 44.488,81.088 47.945,81.088 49.702,82.846 49.702,93.758 buffer1.15@47.19,96.27
10HtzB: buffer1.5 Hclk2.C1 Hclk2.C2 | length 51.9
  Bottom Layer w0.4: Hclk2.C1@49.46,137.62 Hclk2.C2@52,137.62 59.966,129.654 59.966,98.886 buffer1.5@54.81,93.73
10KHtzA: buffer1.4 divi1.13 nano1.6 | length 115.1
  Bottom Layer w0.3: nano1.6@27.005,91.06 nano1.6@27.005,91.19
  Bottom Layer w0.4: nano1.6@27.005,91.06 43.065,75 54.046,75 59.368,80.322 59.368,86.632 buffer1.4@54.81,91.19 ; nano1.6@27.005,91.19 25,93.195 25,116 30,121 30,143.532 divi1.13@34.063,147.595
10KHtzB: buffer1.16 Hclk1.C3 Hclk1.C4 | length 69.2
  Bottom Layer w0.4: buffer1.16@47.19,93.73 41.971,98.949 41.971,147.591 Hclk1.C3@49.46,155.08 Hclk1.C4@52,155.08
12V: C3.1 C4.2 H_12V.C1 H_12V.C2 H_12V.C3 H_12V.C4 H_12V.C5 H_12V.C6 H_12V.C7 H_12V.C8 pin_12V.1 | length 40.4
  Bottom Layer w1: 260.786,107.213 261.713,107.213 C3.1@271,116.5 272,117.5 C4.2@279,117.5
  Bottom Layer w2: H_12V.C2@252.54,107.54 252.867,107.213 260.786,107.213 pin_12V.1@270.365,107.213
100HtzA: buffer1.8 nano1.10 | length 74.1
  Top Layer w0.4: nano1.10@27.005,101.35 35,93.355 35,84 43,76 56,76 60,80 60,96.16 buffer1.8@54.81,101.35
100HtzB: buffer1.12 Hclk1.C7 Hclk1.C8 | length 51.4
  Bottom Layer w0.4: buffer1.12@47.19,103.89 45,106.08 45,145.54 Hclk1.C7@49.46,150 Hclk1.C8@52,150
100KHtzA: buffer1.2 divi1.12 nano1.12 | length 95.3
  Top Layer w0.4: nano1.12@27.005,106.43 39,94.435 39,85 45,79 55,79 56.876,80.876 56.876,84.044 buffer1.2@54.81,86.11
  Bottom Layer w0.3: nano1.12@27.005,106.43 nano1.12@27.294,106.43
  Bottom Layer w0.4: nano1.12@27.294,106.43 32,111.136 32,142.992 divi1.12@34.063,145.055
100KHtzB: buffer1.18 Hclk1.C1 Hclk1.C2 | length 78
  Bottom Layer w0.4: buffer1.18@47.19,88.65 40.501,95.339 40.501,148.661 Hclk1.C1@49.46,157.62 Hclk1.C2@52,157.62
-12V: C5.1 C6.1 H_-12V.C1 H_-12V.C2 H_-12V.C3 H_-12V.C4 H_-12V.C5 H_-12V.C6 H_-12V.C7 H_-12V.C8 pin_-12V.1 | length 39.7
  Bottom Layer w1: 262.439,84.731 263.231,84.731 C6.1@271,92.5 272.382,93.882 C5.1@279.78,93.882
  Bottom Layer w2: H_-12V.C4@252.54,85.38 253.189,84.731 262.439,84.731 pin_-12V.1@270.881,84.731
chaveA: inv1.4 R4.1 | length 27.2
  Bottom Layer w0.5: inv1.4@44.752,35.62 50.384,29.988 R4.1@69.652,29.988
chaveA/: inv1.2 inv1.3 R2.1 | length 32.2
  Bottom Layer w0.5: inv1.2@39.672,35.62 inv1.3@42.212,35.62 44.161,37.569 66.362,37.569 R2.1@69.652,34.279